# Altium PCB PDB_final_han.PcbDoc
Units mm, origin at the board's own origin, x right, y up, seen from the top; angles counter-clockwise.
Board outline 60 x 50 mm, 2 copper layers (Top Layer, Bottom Layer); 36 components, 24 nets, 114 pads, 23 vias.
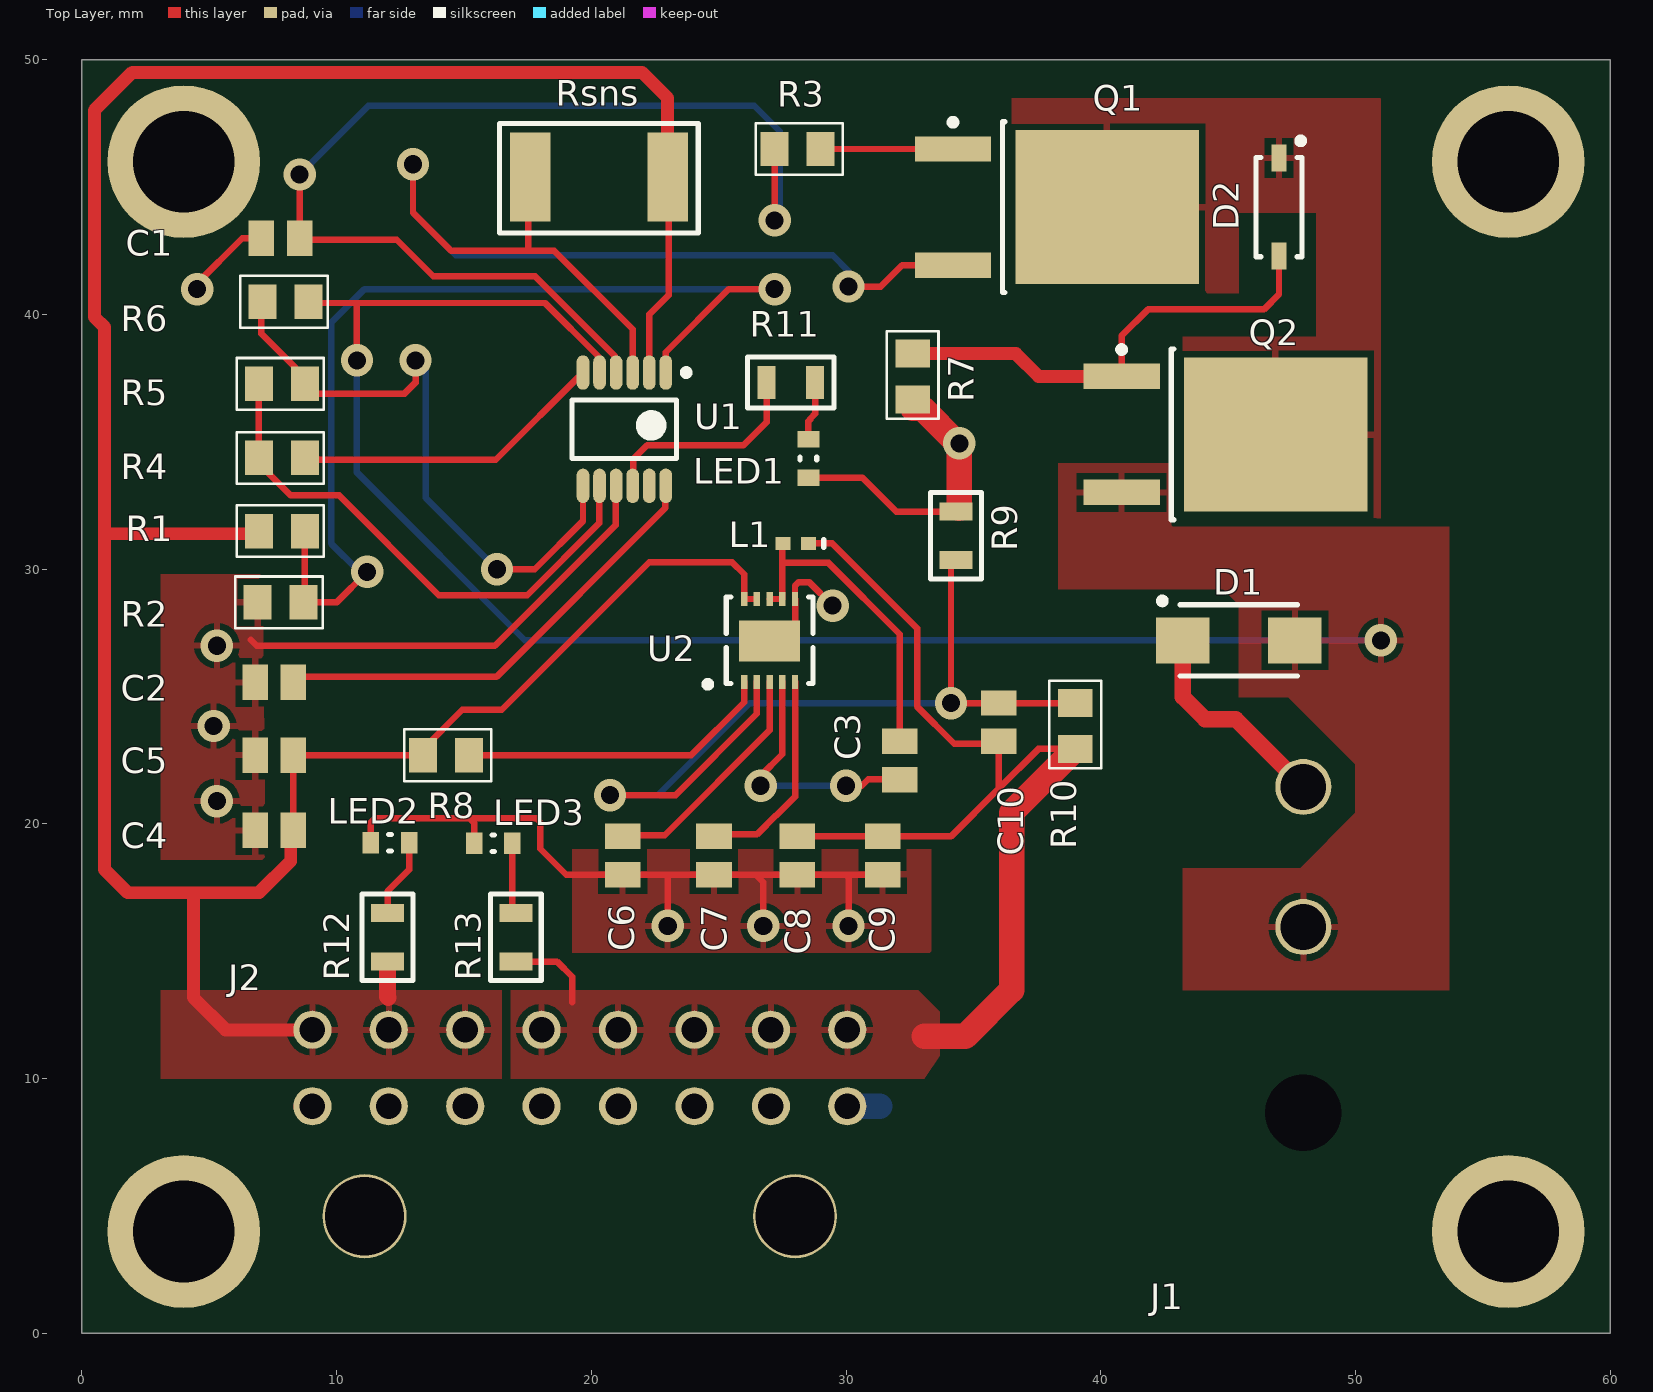
[diagram p0: Top Layer view]
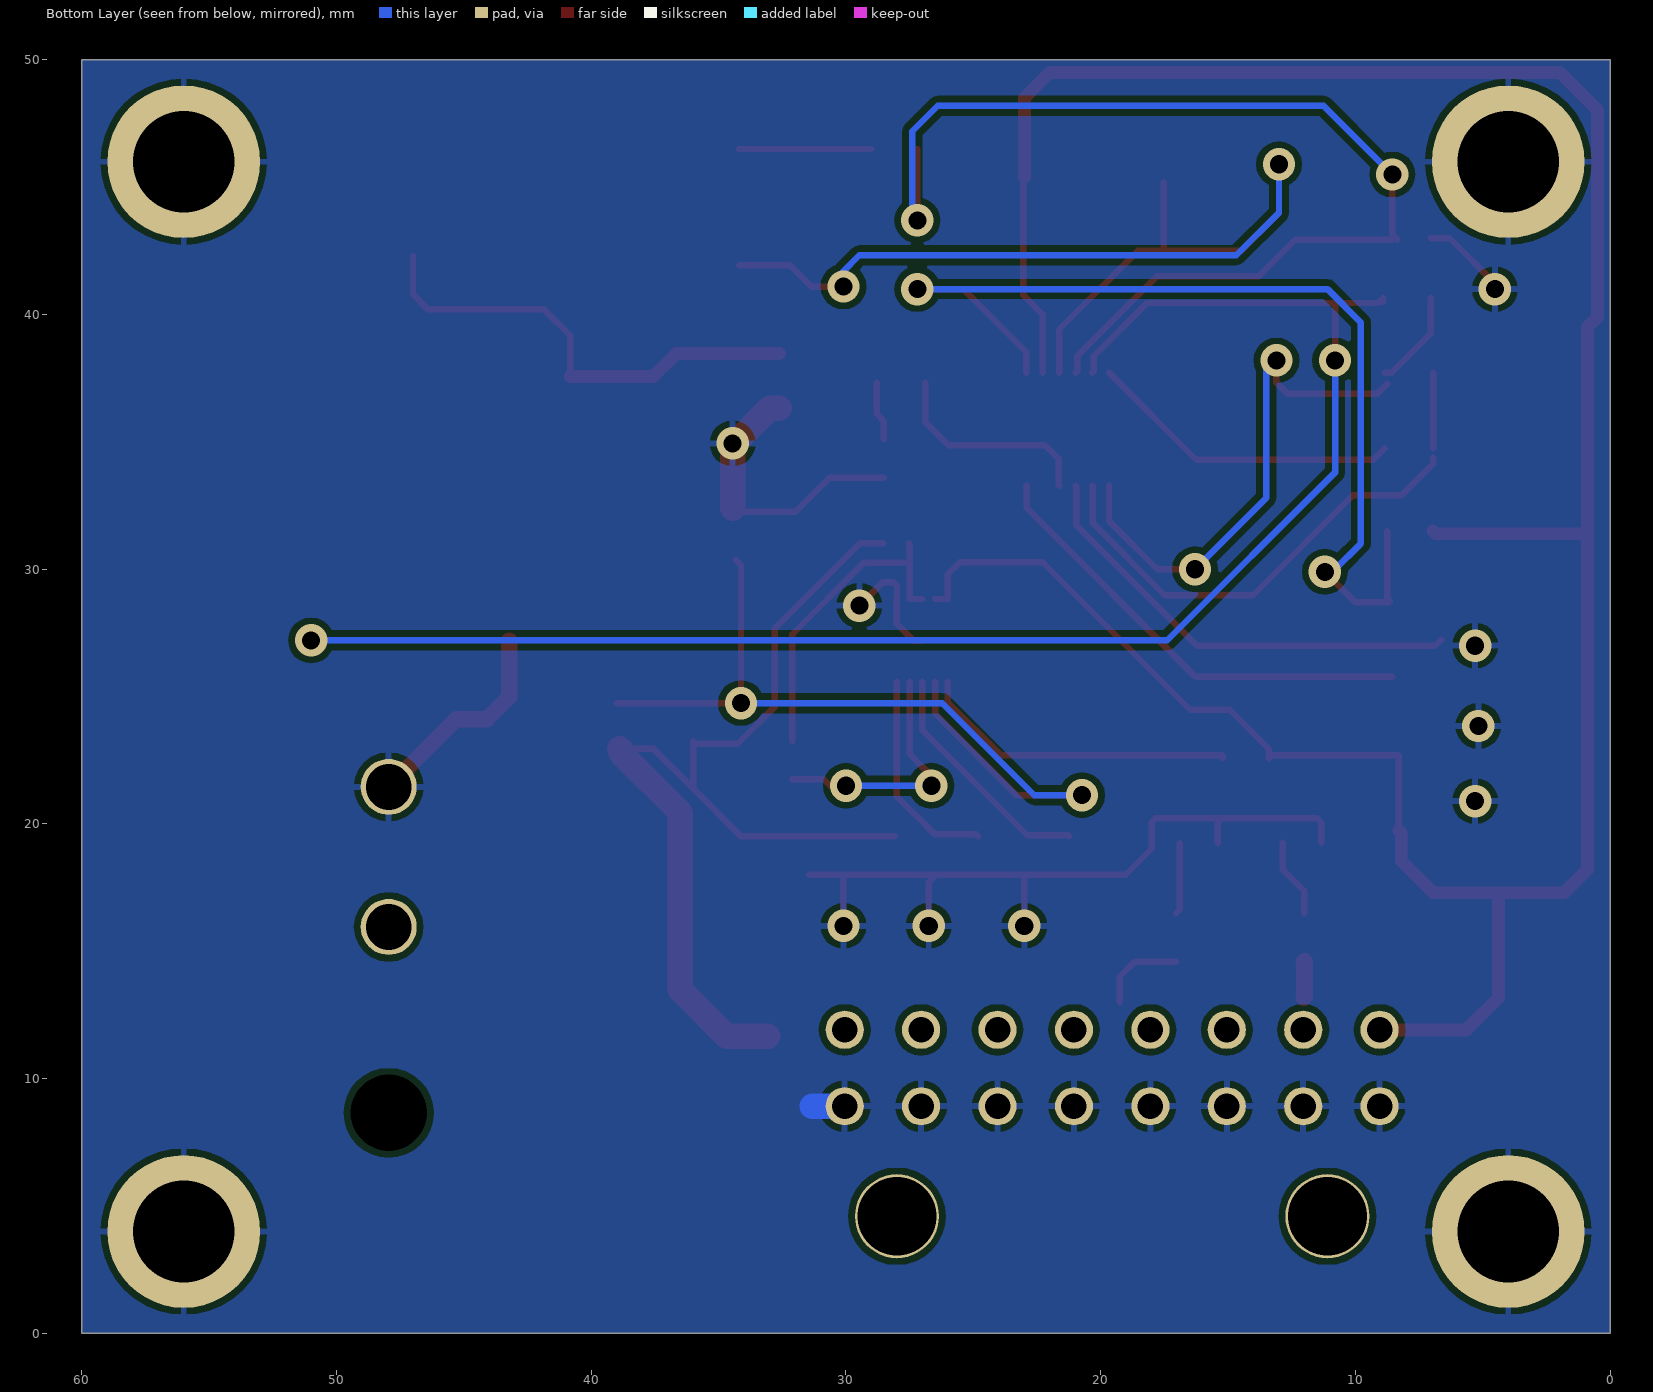
[diagram p1: Bottom Layer view, seen from below]
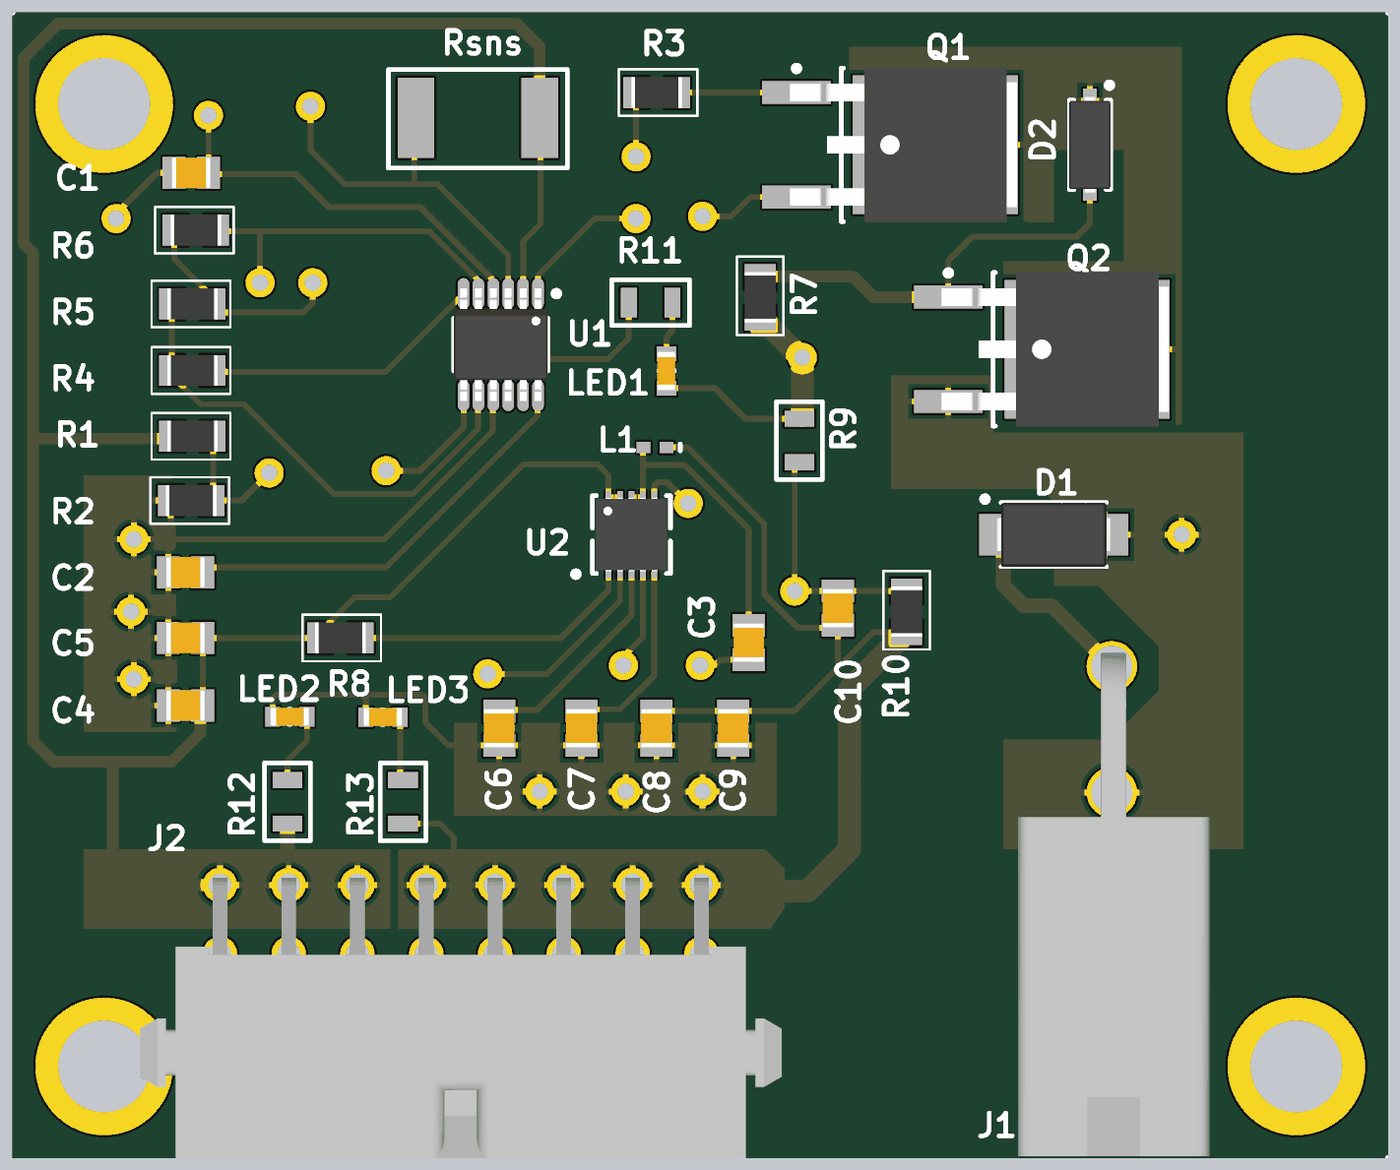
[diagram p2: 3D render of the assembled board from above, using the file's embedded part models]

## Layer stack, top to bottom
Top Solder: solder mask 0.0102, Solder Resist, Dk 3.5
Top Layer: signal copper 0.0356
Dielectric 1: dielectric 0.32, FR-4, Dk 4.8
Bottom Layer: signal copper 0.0356
Bottom Solder: solder mask 0.0102, Solder Resist, Dk 3.5

## Board outline
0,0 60,0 60,50 0,50

## Design rules (kind name [scope] priority, off if disabled: settings)
Clearance [All] p1: gap=0.254 ignorepadtopadclearanceinfootprint=TRUE except(0: Arc-Hole Track-Hole SMDPad-Hole THPad-Hole Via-Hole Fill-Hole Poly-Hole Region-Hole Text-Hole; 0.2: Arc-Arc Arc-Track Arc-SMDPad Track-Track Track-SMDPad SMDPad-SMDPad)
PolygonConnect [All] p1: connectstyle=Relief reliefconductorwidth=0.254 reliefentries=4 polygonreliefangle="90 Angle" airgapwidth=0.254
RoutingVias [All] p1: holewidth=0.711 width=1.27 viastyle="Through Hole" minholewidth=0.711 minwidth=1.27 maxholewidth=0.711 maxwidth=1.27
SolderMaskExpansion [All] p1: expansion=0.102
Width [All] p1: maxlimit=1.25 minlimit=0.254 preferedwidth=0.254 minimp=50.000000 maximp=50.000000 favimp=50.000000
30 further rules are at their usual default settings.

## Components (designator, comment, footprint, x,y, rotation, side; value= is the part's Value field where it differs from the comment)
C1 "47nF" CAPC1613X09N 7.8,43 r0 top
C2 "0.1uF C" CAPC1613X09N 7.548,25.563 r0 top
C3 "100nF 25V" CAPC1613X09N 32.115,22.496 r90 top
C4 "47nF" CAPC1613X09N 7.548,19.75 r0 top
C5 "47nF" CAPC1613X09N 7.55,22.7 r0 top
C6 "47nF" CAPC1613X09N 21.234,18.762 r90 top
C7 "47nF" CAPC1613X09N 24.817,18.762 r90 top
C8 "22uF 10V" CAPC1613X09N 28.09,18.762 r90 top
C9 "22uF 10V" CAPC1613X09N 31.44,18.762 r90 top
C10 "10pF" CAPC1613X09N 36,24 r270 top
D1 "TVS DIODE" DIODE_TVS 45.42,27.209 r0 top
D2 "Zerner Diode" DIOM3716X14N 47,44.22 r270 top
J1 "0768250002" MOLEX_2PIN_MEGAFIT 47.953,8.658 r0 top
J2 "4-794619-6" "THERMO HDR" 5.55,0 r0 top
L1 "Inductor" 0402-A 28.028,31.016 r180 top value=3.3uH
LED1 "Red" LED2 28.525,34.35 r270 top
LED2 "GREEN" LED2 12.097,19.262 r180 top
LED3 "GREEN" LED2 16.155,19.25 r180 top
Q1 "IRLR2908TRLPBF" DPAK 38.3,44.22 r0 top
Q2 "STD35P6LLF6" DPAK 44.92,35.296 r0 top
R1 "56K" R0805#1 7.851,31.5 r0 top
R2 "5K" R0805#1 7.8,28.7 r0 top
R3 "10 ohm" R0805#1 28.1,46.5 r180 top
R4 "100K R" R0805#1 7.851,34.372 r0 top
R5 "10K" R0805#1 7.851,37.279 r0 top
R6 "10K" R0805#1 8,40.5 r0 top
R7 "10K" R0805#1 32.615,37.566 r270 top
R8 "Res1" R0805#1 14.3,22.7 r180 top
R9 "Res1" R0805#2 34.325,31.316 r270 top
R10 "Res1" R0805#1 39,23.846 r270 top
R11 "665" R0805#2 27.834,37.332 r180 top
R12 "2.2k" R0805#2 12,15.552 r90 top
R13 "665" R0805#2 17.037,15.55 r90 top
Rsns "0.01OHM" R2512 20.3,45.4 r180 top
U1 "LT4363" TSOP65P490X110-12N 21.3,35.5 r270 top
U2 "AP65550FN-7" DFN-10 27,27.209 r0 top

## Footprints (in the part's own frame and the unit in brackets; to place one, negate y for a bottom-side part, rotate by r counter-clockwise, add the part's x,y. Pads: shape width x height; smd on the part's side, far side on the other; paste and mask are expansions set on the pad)
0402-A [mm] "Chip Inductor, Body 1.0x0.5mm, IPC High Density"
  rect 0.6x0.5 smd: 1(-0.5,0) 2(0.5,0)
  silkscreen extent -1.1,-0.15 -1.1,0.15, body extent -0.55,-0.3 0.55,0.3, height 0.55
CAPC1613X09N [mm] "Chip Capacitor, 2-Leads, Body 1.60x1.30mm, IPC Medium Density"
  rect 1x1.4 smd: 1(-0.75,0) 2(0.75,0)
  body extent -0.85,-0.67 0.85,0.67, height 0.9
DFN-10 [mm] "QFN, 10-Leads, Body 3.00x3.00mm, Pitch 0.50mm, Thermal Pad 2.40x1.60mm, IPC Medium Density"
  rect 0.25x0.55 smd: 1(-1,-1.625) 2(-0.5,-1.625) 3(0,-1.625) 4(0.5,-1.625) 5(1,-1.625) 6(1,1.625) 7(0.5,1.625) 8(0,1.625) 9(-0.5,1.625) 10(-1,1.625)
  rect 2.4x1.6 smd: 11(0,-0.025)
  silkscreen extent -2.55,-1.85 1.7,1.7, body extent -1.55,-1.6 1.55,1.6, height 0.63
DIODE_TVS [mm] "Molded Diode, 2-Leads, Body 4.29x2.59mm, IPC Medium Density"
  rect 2.1x1.8 smd: 1(-2.2,0) 2(2.2,0)
  silkscreen extent -3.12,-1.4 2.3,1.67, body extent -2.52,-1.4 2.52,1.4, height 2.29
DIOM3716X14N [mm] "Molded Diode, 2-Leads, Body 3.70x1.60mm, IPC Medium Density"
  rect 1.05x0.6 smd: 1(-1.925,0) 2(1.925,0)
  silkscreen extent -2.72,-0.9 1.95,0.97, body extent -2.14,-0.9 2.14,0.9, height 1.35
DPAK [mm] "D-PAK, 3-Pads, Body 6.21x6.73mm (max), IPC Medium Density"
  rect 3x1 smd: 1(-4.1,2.28) 3(-4.1,-2.28)
  rect 7.2x6.05 smd: 4(1.95,0)
  silkscreen extent -4.22,-3.35 -2.05,3.45, body extent -4.39,-3.37 5.52,3.37, height 2.52
LED2 [mm] "Chip Capacitor, 2-Leads, Body 1.60x0.70mm, IPC Medium Density"
  rect 0.65x0.85 smd: 1(-0.75,0) 2(0.75,0)
  silkscreen extent -0.05,-0.33 0.05,0.33, body extent -0.85,-0.4 0.85,0.4, height 0.8
MOLEX_2PIN_MEGAFIT [mm]
  round 2.2 hole 1.8: 1(0,7.3) 2(0,12.8)
  round 0 hole 3: ""(0,0)
  body extent -4.1,-8.58 4.25,13.38, height 14.75
R0805#1 [mm] "Chip Resistor, 2-Leads, Body 2.09x1.30mm, IPC Medium Density"
  rect 1.1x1.35 smd: 1(-0.9,0) 2(0.9,0)
  silkscreen extent -1.78,-1.02 1.65,1.02, body extent -1.1,-0.67 1.1,0.67, height 0.6
R0805#2 [mm]
  rect 0.7x1.3 smd: 1(-0.95,0) 2(0.95,0)
  silkscreen extent -1.7,-1 1.7,1
R2512 [mm]
  rect 1.6x3.5 smd: 1(-2.7,0) 2(2.7,0)
  silkscreen extent -3.9,-2.1 3.9,2.2
"THERMO HDR" [mm]
  round 1.5 hole 1: 1(3.5,11.92) 2(6.5,11.92) 3(9.5,11.92) 4(12.5,11.92) 5(15.5,11.92) 6(18.5,11.92) 7(21.5,11.92) 8(24.5,11.92) 9(24.5,8.92) 10(21.5,8.92) 11(18.5,8.92) 12(15.5,8.92) 13(12.5,8.92) 14(9.5,8.92) 15(6.5,8.92) 16(3.5,8.92)
  round 3.3 hole 3.1: 27(5.55,4.6) 27(22.45,4.6)
  body extent 0,0 28,12.24, height 8.73
TSOP65P490X110-12N [mm] "TSOP, 12-Leads, Body 4.04x3.00mm, Pitch 0.65mm, IPC Medium Density"
  oval 1.35x0.5 smd: 1(-2.225,1.625) 2(-2.225,0.975) 3(-2.225,0.325) 4(-2.225,-0.325) 5(-2.225,-0.975) 6(-2.225,-1.625) 7(2.225,-1.625) 8(2.225,-0.975) 9(2.225,-0.325) 10(2.225,0.325) 11(2.225,0.975) 12(2.225,1.625)
  silkscreen extent -2.35,-2.05 1.15,2.55, body extent -2.45,-2.05 2.45,2.05, height 1.1

## Part data
C1 C4 C5 C6 C7: library part GCM188R71H473KA55D, "CAP CER 0.047UF 50V X7R 0603", Case/Package=0603, Case Code (Metric)=1608, Dielectric=X7R, Manufacturer=Murata, Max Operating Temperature=125°C, Min Operating Temperature=-55°C, Package Quantity=1, Ratings=AEC-Q200, Supplier Part Number 1=490-4934-1-ND, Tolerance=10%, Voltage=50V, Capacitance=47nF, Case Code (Imperial)=0603, Depth=0.8mm, Height=0.8mm, Lead Free="Lead Free", Length=1.6mm, Manufacturer Part Number=GCM188R71H473KA55D, Mount="Surface Mount", Packaging="Tape and Reel", Pricing 1="1=0.16, 10=0.115, 100=0.054, 500=0.03788, 1000=0.03136 (USD)", Radiation Hardening=No, REACH SVHC="No SVHC", Stock 1=40000, Supplier 1=Digi-Key, Termination=SMD/SMT, Thickness=0.035inch, Voltage Rating=50V, Voltage Rating (DC)=50V, Width=0.031inch
C2: library part CL05A104KA5NNNC, "Cap Ceramic 0.1uF 25V X5R 10% SMD 0402 85C Paper T/R", Capacitance=100nF, Case/Package=0402, Case Code (Metric)=1005, Dielectric=X5R, Manufacturer=Samsung, Max Operating Temperature=85°C, Min Operating Temperature=-55°C, Package Quantity=1, Supplier Part Number 1=1276-1043-6-ND, Tolerance=10%, Voltage=25V, Case Code (Imperial)=0402, Depth=0.5mm, Height=0.5mm, Lead Free="Lead Free", Length=1mm, Manufacturer Part Number=CL05A104KA5NNNC, Mount="Surface Mount", Packaging="Tape and Reel", Pricing 1="1=0.1, 10=0.032, 100=0.0141, 500=0.01006, 1000=0.00791, 2500=0.00719, 5000=0.00661 (USD)", Radiation Hardening=No, Stock 1=100000, Supplier 1=Digi-Key, Thickness=0.022inch, Voltage Rating=25V, Voltage Rating (DC)=25V, Width=0.02inch
C3 C8 C9 C10: library part GCM188R71H473KA55D, "CAP CER 0.047UF 50V X7R 0603", Capacitance=47nF, Case/Package=0603, Case Code (Metric)=1608, Dielectric=X7R, Manufacturer=Murata, Max Operating Temperature=125°C, Min Operating Temperature=-55°C, Package Quantity=1, Ratings=AEC-Q200, Supplier Part Number 1=490-4934-1-ND, Tolerance=10%, Voltage=50V, Case Code (Imperial)=0603, Depth=0.8mm, Height=0.8mm, Lead Free="Lead Free", Length=1.6mm, Manufacturer Part Number=GCM188R71H473KA55D, Mount="Surface Mount", Packaging="Tape and Reel", Pricing 1="1=0.16, 10=0.115, 100=0.054, 500=0.03788, 1000=0.03136 (USD)", Radiation Hardening=No, REACH SVHC="No SVHC", Stock 1=40000, Supplier 1=Digi-Key, Termination=SMD/SMT, Thickness=0.035inch, Voltage Rating=50V, Voltage Rating (DC)=50V, Width=0.031inch
D1: library part SMAJ58A-13-F, "TVS DIODE 58VWM 93.6VC SMA", Breakdown Voltage=64.4V, Capacitance=180pF, Case/Package=SMA, Clamping Voltage=93.6V, Current=43A, Forward Voltage=3.5V, Leakage Current=5uA, Manufacturer=Diodes, Max Breakdown Voltage=71.2V, Max Operating Temperature=150°C, Max Output Current=4.3A, Max Power Dissipation=400W, Max Surge Current=40A, Min Operating Temperature=-55°C, Package Quantity=5000, Power Line Protection=No, Reverse Standoff Voltage=58V, Supplier Part Number 1=SMAJ58A-13-FDIDKR-ND, Test Current=1mA, Composition=Zener, Contact Plating=Matte,Tin, Direction=Unidirectional, Element Configuration=Single, ESD Protection=No, Height=2.3mm, Lead Free="Lead Free", Length=2.92mm, Manufacturer Part Number=SMAJ58A-13-F, Max Reverse Leakage Current=5uA, Min Breakdown Voltage=64.4V, Mount="Surface Mount", Number of Elements=1, Number of Pins=2, Number of Unidirectional Channels=1, Packaging="Tape and Reel", Peak Pulse Current=4.3A, Peak Pulse Power=400W, Polarity=Unidirectional, Power Dissipation=400W, Pricing 1="1=0.41, 10=0.311, 100=0.1937, 500=0.13256, 1000=0.10197 (USD)", Radiation Hardening=No, Reverse Breakdown Voltage=64.4V, Stock 1=387453, Supplier 1=Digi-Key, Termination=SMD/SMT, Voltage=58V, Width=4.6mm, Working Voltage=58V
D2: library part 1N4148W-TP, "DIODE GEN PURP 100V 150MA SOD123", Average Rectified Current=150mA, Capacitance=4pF, Forward Voltage=1V, Manufacturer=MCC, Max Forward Surge Current (Ifsm)=1A, Max Operating Temperature=150°C, Max Repetitive Reverse Voltage (Vrrm)=100V, Max Reverse Leakage Current=5uA, Max Surge Current=2A, Min Operating Temperature=-65°C, Package Quantity=3000, Power Dissipation=400mW, Supplier Part Number 1=1N4148WTPMSDKR-ND, Current Rating=150mA, Element Configuration=Single, Forward Current=150mA, Height=1.2mm, Lead Free="Lead Free", Length=2.85mm, Manufacturer Part Number=1N4148W-TP, Max Reverse Voltage (DC)=100V, Mount="Surface Mount", Number of Pins=2, Output Current=150mA, Packaging="Tape and Reel", Peak Non-Repetitive Surge Current=2A, Polarity=Standard, Pricing 1="1=0.14, 10=0.131, 100=0.0856, 500=0.04186, 1000=0.02854 (USD)", Radiation Hardening=No, REACH SVHC=Unknown, Recovery Time=4ns, Reverse Recovery Time=4ns, Stock 1=546277, Supplier 1=Digi-Key, Voltage Rating (DC)=100V, Width=1.8mm
J1: "CONN_2Position_MEGAFIT Molex Through Hole, Right Angle Tin", Colour=Black, Manufacturer=Molex, Supplier Part Number 1=WM11969-ND, ComponentLink1Description=http://www.molex.com/pdm_docs/ps/PS-76823-100.pdf, ComponentLink1URL=http://www.molex.com/pdm_docs/ps/PS-76823-100.pdf, Connector Type="Male Pin", Contact Plating=Tin, Fastening Type=Ramp, Manufacturer Part Number=0768250002, Mount="Through Hole", Number of Positions=2, Number of Rows=2, Packaging=Tray, Pricing 1="1=1.08, 10=0.946, 25=0.89, 50=0.853, 100=0.816, 250=0.7418, 500=0.6676, 1000=0.5934, 2500=0.5378 (USD)", Row Spacing=0.224inch, Stock 1=2862, Supplier 1=Digi-Key, Termination=Solder
J2: "CONN HEADER R/A 16POS 3MM", Color=Black, Contact Current Rating=5A, Flammability Rating="UL94 V-0", Manufacturer="TE Connectivity", Max Operating Temperature=221°C, Max Voltage Rating (AC)=250V, Min Operating Temperature=-40°C, Number of Power Positions=16, Package Quantity=130, Supplier Part Number 1=A121591-ND, Approvals=CSA, Circuit Application=Power, ComponentLink1Description=http://www.te.com/commerce/DocumentDelivery/DDEController?Action=srchrtrv&DocNm=82181_SOFTSHELL_HIGH_DENSITY&DocType=Catalog+Section&DocLang=English&PartCntxt=&src-supplier=Avnet, ComponentLink1URL=http://www.te.com/commerce/DocumentDelivery/DDEController?Action=srchrtrv&DocNm=82181_SOFTSHELL_HIGH_DENSITY&DocType=Catalog+Section&DocLang=English&PartCntxt=&src-supplier=Avnet, ComponentLink2Description=http://www.te.com/commerce/DocumentDelivery/DDEController?Action=srchrtrv&DocNm=794619&DocType=Customer+Drawing&DocLang=English&src-supplier=Digi-Key, ComponentLink2URL=http://www.te.com/commerce/DocumentDelivery/DDEController?Action=srchrtrv&DocNm=794619&DocType=Customer+Drawing&DocLang=English&src-supplier=Digi-Key, ComponentLink3Description=http://www.onlinecomponents.com/productFiles/mf-AMP/eng_cs_82181_softshell_high_density_0508.pdf?src-supplier=Onlinecomponents.com, ComponentLink3URL=http://www.onlinecomponents.com/productFiles/mf-AMP/eng_cs_82181_softshell_high_density_0508.pdf?src-supplier=Onlinecomponents.com, Connector System=Wire-to-Board, Connector Type=Pin, Contact Material=Brass, Contact Plating=Gold,Tin, Contact Retention="No (Without)", Current Rating=5A, Depth=11.92mm, ELV=Compliant, Fastening Type=Ramp, Housing Color=Black, Housing Material=Nylon, Length=28mm, Manufacturer Part Number=4-794619-6, Mating Alignment="Yes (With)", Mating Retention="Yes (With)", Mount="Through Hole", Number of Contacts=16, Number of Ports=1, Number of Positions=16, Number of Rows=2, Number of Terminals=16, Orientation="Right Angle", Packaging=Tray, PCB Mounting Orientation="Right Angle", PCB Mount Retention=With, PCB Thickness=0.063inch, Pitch=0.118inch, Pricing 1="1=2.43, 10=2.209, 130=1.8933, 520=1.5778, 1040=1.3524, 5070=1.1991 (USD)", Radiation Hardening=No, Row Spacing=0.118mm, Sealable="No (Without)", Stock 1=1304, Strain Relief="No (Without)", Supplier 1=Digi-Key, Termination=Solder, VDE Tested=Yes, Voltage Rating=250V
L1: "IND 3.3µH 6.5A 25.2 mOhm Max Nonstandard", Code_IEC=1005, Code_JEITA=0402, LatestRevisionDate=29-May-2009, LatestRevisionNote="IPC-7351 Footprint Added.", PackageDescription="Chip Inductor", PackageReference=0402-A, Published=8-Jun-2000, Publisher="Altium Limited"
LED1 LED2 LED3: library part 150060VS75000, "LED GREEN CLEAR 0603 SMD", Case/Package=0603, Case Code (Metric)=1608, Colour=Green, Forward Current=30mA, Forward Voltage=2V, Manufacturer="Wurth Electronics", Max Operating Temperature=85°C, Min Operating Temperature=-40°C, Package Quantity=1, Supplier Part Number 1=732-4980-1-ND, Test Current=20mA, Case Code (Imperial)=0603, ComponentLink1Description=http://www.farnell.com/datasheets/1911347.pdf, ComponentLink1URL=http://www.farnell.com/datasheets/1911347.pdf, ComponentLink2Description=https://katalog.we-online.de/led/datasheet/150060VS75000.pdf, ComponentLink2URL=https://katalog.we-online.de/led/datasheet/150060VS75000.pdf, ComponentLink3Description=https://www.distrelec.biz/Web/Downloads/_t/ds/150060VS75000_eng_tds.pdf?mime=application%2Fpdf, ComponentLink3URL=https://www.distrelec.biz/Web/Downloads/_t/ds/150060VS75000_eng_tds.pdf?mime=application%2Fpdf, ComponentLink4Description=http://www.produktinfo.conrad.com/datenblaetter/750000-774999/759431-da-01-en-CHIPLED_0603_W_KL_H_GRUEN_150060VS7500.pdf, ComponentLink4URL=http://www.produktinfo.conrad.com/datenblaetter/750000-774999/759431-da-01-en-CHIPLED_0603_W_KL_H_GRUEN_150060VS7500.pdf, Dominant Wavelength=570nm, Height=0.7mm, Length=1.6mm, Lens Style=Clear,Rectangular, Luminous Intensity=40mcd, Manufacturer Part Number=150060VS75000, Mount="Surface Mount", Number of Pins=2, Packaging="Tape and Reel", Pricing 1="1=0.14, 50=0.129, 100=0.11, 500=0.095 (USD)", REACH SVHC=Unknown, Stock 1=219425, Supplier 1=Digi-Key, Viewing Angle=140°, Wavelength=570nm, Width=0.8mm
Q1: "MOSFET N-CH 80V 30A DPAK", Case/Package=DPAK, Continuous Drain Current (ID)=39A, Drain to Source Breakdown Voltage=80V, Drain to Source Resistance=28mR, Gate to Source Voltage (Vgs)=16V, Input Capacitance=1.89nF, Manufacturer="International Rectifier", Max Operating Temperature=175°C, Max Power Dissipation=120W, Min Operating Temperature=-55°C, On-State Resistance=28MR, Package Quantity=1, Supplier Part Number 1=IRLR2908TRLPBFDKR-ND, Threshold Voltage=1V, Drain to Source Voltage (Vdss)=80V, Element Configuration=Single, Fall Time=55ns, Height=2.26mm, Length=6.73mm, Manufacturer Part Number=IRLR2908TRLPBF, Mount="Surface Mount", Nominal Vgs=1V, Number of Elements=1, Number of Pins=3, Packaging="Tape and Reel", Power Dissipation=120W, Pricing 1="1=1.4, 10=1.239, 100=0.9794, 500=0.75958, 1000=0.59966 (USD)", Radiation Hardening=No, Rds On Max=28mR, REACH SVHC="No SVHC", Rise Time=95ns, Stock 1=4490, Supplier 1=Digi-Key, Turn-Off Delay Time=36ns, Turn-On Delay Time=12ns, Width=6.22mm
Q2: "POWER MOSFET", Case/Package=TO-252-3, Continuous Drain Current (ID)=35A, Drain to Source Voltage (Vdss)=60V, Input Capacitance=3.78nF, Manufacturer=STMicroelectronics, Max Power Dissipation=70W, Supplier Part Number 1=497-15462-6-ND, Manufacturer Part Number=STD35P6LLF6, Mount="Surface Mount", Packaging="Tape and Reel", Pricing 1="1=1.41, 10=1.248, 100=0.9867, 500=0.76518, 1000=0.6041 (USD)", Rds On Max=28mR, Stock 1=7152, Supplier 1=Digi-Key
R1: library part ERA-6AEB104V, "Res Thin Film 0805 100K Ohm 0.1% 0.125W(1/8W) ±25ppm/C Molded SMD Automotive Punched T/R", Case/Package=0805, Case Code (Metric)=2012, Manufacturer=Panasonic, Max Operating Temperature=155°C, Max Power Dissipation=125mW, Min Operating Temperature=-55°C, Package Quantity=1, Resistance=100kR, Temperature Coefficient=25ppm/°C, Tolerance=0.1%, Voltage Rating=100V, Case Code (Imperial)=0805, Composition="Thin Film", Contact Plating=Tin, Depth=1.25mm, Features="Automotive AEC-Q200", Height=0.5mm, Lead Free="Lead Free", Length=2mm, Manufacturer Part Number=ERA-6AEB104V, Military Standard=Not, Mount="Surface Mount", Number of Pins=2, Number of Terminations=2, Packaging="Tape and Reel", Power Rating=125mW, Pricing 1="1=0.324, 10=0.2241, 25=0.2017, 100=0.1064, 250=0.0956, 500=0.0945, 1000=0.0477, 3000=0.0408 (USD)", Radiation Hardening=No, REACH SVHC="No SVHC", Stock 1=2428, Supplier 1=Arrow, Supplier Part Number 1=ERA-6AEB104V, Termination=Solder, Voltage Rating (DC)=100V, Width=1.25mm
R2 R6: library part PNM0805E5001BST5, "Thin Film Resistors - SMD 200mW 5Kohm 0.1% 25ppm", Case/Package=0805, Case Code (Metric)=2012, Manufacturer="Vishay Dale Thin Film", Max Operating Temperature=125°C, Min Operating Temperature=-55°C, Power Rating=200mW, Resistance=5kR, Supplier Part Number 1=1857222, Temperature Coefficient=25ppm/°C, Tolerance=0.1%, Voltage Rating=100V, Case Code (Imperial)=0805, Composition="Thin Film", Height=0.015inch, Length=0.08inch, Manufacturer Part Number=PNM0805E5001BST5, Packaging="Tape and Reel", Pricing 1="1=2.59, 10=1.9, 50=1.53, 100=1.36 (GBP)", Radiation Hardening=No, REACH SVHC=Unknown, Stock 1=1231, Supplier 1=Farnell, Voltage Rating (DC)=100V, Width=0.05inch
R3: library part RL1220S-100-F, "RES SMD 10 OHM 1% 1/3W 0805", Case/Package=0805, Case Code (Metric)=2012, Manufacturer=Susumu, Max Operating Temperature=125°C, Max Power Dissipation=333mW, Min Operating Temperature=-55°C, Package Quantity=1, Power Rating=250mW, Resistance=10R, Supplier Part Number 1=754-RL1220S-100-F, Temperature Coefficient=200ppm/°C, Tolerance=1%, Voltage Rating (DC)=100V, Case Code (Imperial)=0805, Composition="Thin Film", Height=0.02inch, Lead Free="Lead Free", Length=0.079inch, Manufacturer Part Number=RL1220S-100-F, Number of Pins=2, Number of Terminations=2, Packaging="Tape and Reel", Pricing 1="1=0.34, 10=0.156, 50=0.156, 100=0.07, 1000=0.048, 10000=0.034 (USD)", REACH SVHC=Unknown, Stock 1=32764, Supplier 1=Mouser, Termination=SMD/SMT, Weight=0.000194oz, Width=0.049inch
R4: library part KTR10EZPF2203, "RES 220K OHM 1/8W 1% 0805 SMD", Case/Package=0805, Manufacturer=Rohm, Resistance=220000R, Supplier Part Number 1=RHM220KAHDKR-ND, Manufacturer Part Number=KTR10EZPF2203, Pricing 1="1=0.19, 10=0.16, 100=0.0624, 1000=0.02614, 2500=0.02396 (USD)", Stock 1=23335, Supplier 1=Digi-Key
R5 R7: library part RNCF0805DTE10K0, "Res Thin Film 0805 10K Ohm 0.5% 0.1W(1/10W) ±25ppm/C Molded SMD Paper T/R", Case/Package=0805, Case Code (Metric)=2012, Manufacturer="Stackpole Electronics", Max Operating Temperature=155°C, Max Power Dissipation=125mW, Min Operating Temperature=-55°C, Resistance=10kR, Supplier Part Number 1=RNCF0805DTE10K0DKR-ND, Temperature Coefficient=25ppm/°C, Tolerance=0.5%, Case Code (Imperial)=0805, Composition="Thin Film", Contact Plating=Matte,Tin, Depth=1.25mm, Features="Moisture Resistant", Height=0.026inch, Length=2mm, Manufacturer Part Number=RNCF0805DTE10K0, Military Standard=Not, Mount="Surface Mount", Number of Terminations=2, Packaging="Tape and Reel", Pricing 1="1=0.17, 10=0.14, 100=0.0546, 1000=0.02287, 2500=0.02096 (USD)", Radiation Hardening=No, Stock 1=377154, Supplier 1=Digi-Key, Width=0.049inch
R8: library part ERA-6AEB104V, "Res Thin Film 0805 1K Ohm 0.1% 0.125W(1/8W) ±25ppm/C Molded SMD Automotive Punched T/R", Case/Package=0805, Case Code (Metric)=2012, Manufacturer=Panasonic, Max Operating Temperature=155°C, Max Power Dissipation=125mW, Min Operating Temperature=-55°C, Package Quantity=1, Resistance=100kR, Temperature Coefficient=25ppm/°C, Tolerance=0.1%, Voltage Rating=100V, Case Code (Imperial)=0805, Composition="Thin Film", Contact Plating=Tin, Depth=1.25mm, Features="Automotive AEC-Q200", Height=0.5mm, Lead Free="Lead Free", Length=2mm, Manufacturer Part Number=ERA-6AEB104V, Military Standard=Not, Mount="Surface Mount", Number of Pins=2, Number of Terminations=2, Packaging="Tape and Reel", Power Rating=125mW, Pricing 1="1=0.324, 10=0.2241, 25=0.2017, 100=0.1064, 250=0.0956, 500=0.0945, 1000=0.0477, 3000=0.0408 (USD)", Radiation Hardening=No, REACH SVHC="No SVHC", Stock 1=2428, Supplier 1=Arrow, Supplier Part Number 1=ERA-6AEB104V, Termination=Solder, Voltage Rating (DC)=100V, Width=1.25mm
R9 R11 R12 R13: library part ERA-6AEB104V, "Res Thin Film 0805 22.1K Ohm 0.1% 0.125W(1/8W) ±25ppm/C Molded SMD Automotive Punched T/R", Case/Package=0805, Case Code (Metric)=2012, Manufacturer=Panasonic, Max Operating Temperature=155°C, Max Power Dissipation=125mW, Min Operating Temperature=-55°C, Package Quantity=1, Resistance=100kR, Temperature Coefficient=25ppm/°C, Tolerance=0.1%, Voltage Rating=100V, Case Code (Imperial)=0805, Composition="Thin Film", Contact Plating=Tin, Depth=1.25mm, Features="Automotive AEC-Q200", Height=0.5mm, Lead Free="Lead Free", Length=2mm, Manufacturer Part Number=ERA-6AEB104V, Military Standard=Not, Mount="Surface Mount", Number of Pins=2, Number of Terminations=2, Packaging="Tape and Reel", Power Rating=125mW, Pricing 1="1=0.324, 10=0.2241, 25=0.2017, 100=0.1064, 250=0.0956, 500=0.0945, 1000=0.0477, 3000=0.0408 (USD)", Radiation Hardening=No, REACH SVHC="No SVHC", Stock 1=2428, Supplier 1=Arrow, Supplier Part Number 1=ERA-6AEB104V, Termination=Solder, Voltage Rating (DC)=100V, Width=1.25mm
R10: library part ERA-6AEB104V, "Res Thin Film 0805 124K Ohm 0.1% 0.125W(1/8W) ±25ppm/C Molded SMD Automotive Punched T/R", Case/Package=0805, Case Code (Metric)=2012, Manufacturer=Panasonic, Max Operating Temperature=155°C, Max Power Dissipation=125mW, Min Operating Temperature=-55°C, Package Quantity=1, Resistance=100kR, Temperature Coefficient=25ppm/°C, Tolerance=0.1%, Voltage Rating=100V, Case Code (Imperial)=0805, Composition="Thin Film", Contact Plating=Tin, Depth=1.25mm, Features="Automotive AEC-Q200", Height=0.5mm, Lead Free="Lead Free", Length=2mm, Manufacturer Part Number=ERA-6AEB104V, Military Standard=Not, Mount="Surface Mount", Number of Pins=2, Number of Terminations=2, Packaging="Tape and Reel", Power Rating=125mW, Pricing 1="1=0.324, 10=0.2241, 25=0.2017, 100=0.1064, 250=0.0956, 500=0.0945, 1000=0.0477, 3000=0.0408 (USD)", Radiation Hardening=No, REACH SVHC="No SVHC", Stock 1=2428, Supplier 1=Arrow, Supplier Part Number 1=ERA-6AEB104V, Termination=Solder, Voltage Rating (DC)=100V, Width=1.25mm
Rsns: library part PE2512FKE7W0R01L, "RES SMD 0.01 OHM 1% 2W 2512", Case/Package=2512, Case Code (Metric)=6432, Manufacturer=Yageo, Max Operating Temperature=170°C, Max Power Dissipation=2W, Min Operating Temperature=-55°C, Resistance=10mR, Temperature Coefficient=50ppm/°C, Tolerance=1%, Case Code (Imperial)=2512, Composition="Metal Film", Features="Automotive AEC-Q200,Moisture Resistant", Height=0.03inch, Lead Free="Lead Free", Length=0.248inch, Manufacturer Part Number=PE2512FKE7W0R01L, Number of Terminations=2, Packaging="Tape and Reel", Pricing 1="1=0.57, 10=0.479, 25=0.4104, 50=0.3694, 100=0.3215, 250=0.28732, 500=0.23258, 1000=0.18812 (USD)", Stock 1=15960, Supplier 1=Digi-Key, Width=0.122inch
U1: library part LT4363CMS-2#PBF, "IC SURGE STOPPER HV 12-MSOP", Case/Package=MSOP, Clamping Voltage=27V, Manufacturer="Analog Devices / Linear Technology", Max Operating Temperature=70°C, Max Supply Voltage=80V, Min Operating Temperature=0°C, Min Supply Voltage=4V, Package Quantity=37, Supplier Part Number 1=LT4363CMS-2#PBF-ND, Lead Free="Lead Free", Manufacturer Part Number=LT4363CMS-2#PBF, Number of Circuits=1, Number of Pins=12, Packaging=Rail/Tube, Pricing 1="1=5.41, 25=3.6108, 100=3.0702 (USD)", REACH SVHC="No SVHC", Stock 1=1640, Supplier 1=Digi-Key, Working Voltage=80V
U2: "IC BUCK SYNC 5A, 18V VIN MAX 650kHz COT Step-Down Conv", Manufacturer=Diodes, Max Input Voltage=18V, Max Operating Temperature=85°C, Max Output Voltage=6V, Min Input Voltage=4.5V, Min Operating Temperature=-40°C, Min Output Voltage=760mV, Operating Supply Current=900uA, Output Current=5A, Package Quantity=3000, Supplier Part Number 1=AP65550FN-7DICT-ND, Switching Frequency=650kHz, Lead Free="Lead Free", Manufacturer Part Number=AP65550FN-7, Min Supply Voltage=4.5V, Mount="Surface Mount", Number of Outputs=1, Output Configuration=Positive, Output Type=Adjustable, Output Voltage=6V, Packaging="Tape and Reel", Pricing 1="1=0.77, 10=0.68, 100=0.5212, 500=0.412, 1000=0.3296 (USD)", Stock 1=135, Supplier 1=Digi-Key, Synchronous Rectifier=Yes

## Free pads (board coordinates)
  round 6 hole 4: 2(4,4) 2(4,46) 2(56,4) 2(56,46)

## Via types
v1: diameter 1.27, hole 0.711, Top Layer to Bottom Layer, 23 vias

## Nets (pads, with @x,y where several pads share a name; then routed paths per layer and width w, separated by ;. In a path a pad name is that pad's centre, name@x,y a point inside that pad or via, vN(x,y) a via of type N, cw(c..) or ccw(c..) an arc to the next point about the centre after c; other vN are vias at no path point)
5V_OUT: C8.2 C9.2 C10.2 J2.4 J2.5 J2.6 J2.7 J2.8 L1.1 R10.2 R13.1 | length 45.2
  Top Layer w0.254: R13.1 18.65,14.6 19.25,14 19.25,13 ; C8.2 C9.2 34.123,19.512 36,21.39 ; L1.1 29.461,31.016 32.79,27.687 32.79,24.613 34.253,23.15 35.9,23.15 C10.2 36,21.39 ; R10.2 38.875,22.946 37.556,22.946 36,21.39
  Top Layer w0.654: J2.4 J2.4@18.05,12.149
  Top Layer w1: J2.5@20.955,11.92 J2.5@21.051,12.016 ; 33.065,11.658 34.682,11.658 36.5,13.476 36.5,20.446 38.825,22.771 38.825,22.896 R10.2@38.875,22.946
12V_OUT: C4.2 C5.2 J2.1 J2.2 J2.3 R1.1 R8.2 R12.1 Rsns.1 U1.2 U2.9 U2.10 | length 116.7
  Top Layer w0.254: C4.2 C5.2 13.275,22.698 13.4,22.573 R8.2 13.4,22.946 14.934,24.48 16.48,24.48 22.275,30.275 25.525,30.275 26,29.8 U2.10 U2.9 ; U1.2 22.275,40.006 23.037,40.768 23.037,45.363 Rsns.1
  Top Layer w0.508: R1.1 6.847,31.396 0.896,31.396 ; C4.2 8.2,19.652 8.2,18.55 6.95,17.3 4.377,17.3 ; J2.1 5.646,11.92 4.377,13.19 4.377,17.3 ; Rsns.1 23,48.499 21.991,49.508 1.984,49.508 0.492,48.016 0.492,39.908 0.896,39.504 0.896,31.396 ; 0.896,31.396 0.896,18.207 1.803,17.3 4.377,17.3
  Top Layer w0.654: J2.2@12.025,11.945 J2.2 ; 12.025,13.19 12,13.215 R12.1 12.002,14.602 R12.1@12.025,14.579
+12V: D1.2 J1.1 Q2.3 R6.2 U1.5 | length 62.7
  Top Layer w0.254: R6.2 R6.2@9.06,40.5 ; R6.2@8.9,40.66 R6.2@9.06,40.5 ; v1(10.8,38.2) 10.8,40.454 ; U1.5 20.278,37.772 20.278,38.363 18.187,40.454 10.8,40.454 ; R6.2@9.06,40.5 9.106,40.454 10.8,40.454
  Bottom Layer w0.254: v1(10.8,38.2) 10.8,33.8 17.391,27.209 v1(51,27.209)
BOOTSTRAP_5V: C3.1 U2.4 | length 10
  Top Layer w0.254: v1(26.647,21.5) 26.647,21.888 27.5,22.741 U2.4 ; v1(30,21.5) 30.616,21.5 30.869,21.753 C3.1@32.115,21.753
  Bottom Layer w0.254: v1(26.647,21.5) v1(30,21.5)
DRAIN: D2.1 Q1.4 Q2.4
FB_5V: C10.1 R9.2 R10.1 U2.2 | length 33.8
  Top Layer w0.254: v1(20.734,21.132) 23.307,21.132 26.5,24.325 U2.2 ; R9.2 34.123,30.164 v1(34.123,24.746) 35.996,24.746 C10.1 36.004,24.746 R10.1
  Bottom Layer w0.254: v1(20.734,21.132) 22.605,21.132 26.219,24.746 v1(34.123,24.746)
FET_GATE: Q1.1 R3.1 | length 5.2
  Top Layer w0.254: R3.1 Q1.1
GND: C1.1 C2.1 C4.1 C5.1 C6.1 C7.1 C8.1 C9.1 D1.1 J1.2 J2.9 J2.10 J2.11 J2.12 J2.13 J2.14 J2.15 J2.16 LED1.2 LED2.2 LED3.2 pad.2 R2.1 R7.2 R9.1 U1.9 U2.6 U2.11 | length 77.3
  Top Layer w0.254: v1(4.523,41) 4.523,41.223 6.3,43 C1.1 ; 6.632,27.232 6.864,27 16.218,27 20.956,31.738 20.956,33.256 U1.9 ; LED2.2 11.347,20.068 11.501,20.223 15.216,20.223 ; LED3.2 15.405,20.034 15.216,20.223 ; v1(23,16) 23,17.975 23.037,18.012 ; v1(26.752,16) 26.752,17.715 26.454,18.012 ; U2.11 27.327,27.184 28,27.857 U2.6 27.998,28.836 27.998,29.351 28.147,29.5 28.548,29.5 v1(29.475,28.573) ; LED1.2 30.64,33.6 31.974,32.266 R9.1 R9.1@34.452,32.393 ; v1(30.1,16) 30.1,17.912 30,18.012 ; C9.1 30,18.012 ; 15.216,20.223 17.851,20.223 18,20.074 18,19.029 19.016,18.012 C6.1 23.037,18.012 ; 23.037,18.012 C7.1 26.454,18.012 ; 26.454,18.012 C8.1 30,18.012
  Top Layer w0.635: D1.1 43.22,24.992 44.1,24.112 45.299,24.112 47.911,21.5 J1.2@47.953,21.5
  Top Layer w1: J2.16@8.8,8.9 J2.16@9.05,8.9 ; R7.2@32.615,36.328 32.994,36.328 34.379,34.943 v1(34.452,34.943) R9.1@34.452,32.393
  Bottom Layer w1: J2.9 31.32,8.92
  other v1: 5.3,20.9 5.173,23.846 5.3,27
IC_GATE: C1.2 R3.2 U1.4 | length 44.3
  Top Layer w0.254: C1.2@8.348,42.94 8.55,43.142 v1(8.55,45.5) ; C1.2@8.55,42.94 12.36,42.94 13.8,41.5 17.791,41.5 20.928,38.363 20.928,37.772 U1.4 ; v1(27.2,43.7) R3.2
  Bottom Layer w0.254: v1(8.55,45.5) 11.25,48.2 26.4,48.2 27.4,47.2 27.4,43.9 v1(27.2,43.7)
NetC2_2: C2.2 U1.12 | length 18
  Top Layer w0.254: C2.2@8.55,25.775 16.275,25.775 22.906,32.406 22.906,33.275 U1.12
NetD2_2: D2.2 Q2.1 R7.1 | length 18.5
  Top Layer w0.254: Q2.1 40.82,39.164 41.859,40.203 46.408,40.203 47,40.795 D2.2
  Top Layer w0.508: R7.1 36.666,38.466 37.556,37.576 Q2.1
NetLED1_1: LED1.1 R11.1 | length 2.3
  Top Layer w0.254: LED1.1 28.525,35.806 28.595,35.876 28.595,35.915 28.784,36.104 R11.1
NetLED2_1: LED2.1 R12.2 | length 3.1
  Top Layer w0.254: R12.2 12,17.361 12.847,18.207 LED2.1
NetLED3_1: LED3.1 R13.2 | length 2.8
  Top Layer w0.254: LED3.1 16.905,16.632 R13.2
NetR1_2: R1.2 R2.2 U1.1 | length 41.6
  Top Layer w0.254: R1.2 8.751,28.855 8.648,28.752 R2.2 10,28.7 v1(11.2,29.9) ; U1.1 22.925,38.525 25.4,41 v1(27.2,41)
  Bottom Layer w0.254: v1(11.2,29.9) 11.2,30.3 11,30.1 10.85,29.95 9.784,31.016 9.784,39.684 11.1,41 26.8,41 27.2,41.4 v1(27.2,41)
NetR4_1: R4.1 R5.1 U1.8 | length 21.3
  Top Layer w0.254: R4.1@6.95,34.75 R5.1@6.95,37.725 ; R4.1 6.951,34.149 8.2,32.9 10.1,32.9 14.016,28.984 17.484,28.984 20.306,31.806 20.306,33.256 U1.8
NetR5_2: R5.2 R6.1 U1.7 | length 24.5
  Top Layer w0.254: R6.1@7.05,40.66 7.05,39.25 8.575,37.725 R5.2@8.85,37.725 ; R5.2 9.13,36.9 12.668,36.9 13.1,37.332 v1(13.1,38.2) ; v1(16.3,30) 17.782,30 19.675,31.893 U1.7
  Bottom Layer w0.254: v1(13.1,38.2) 13.5,37.8 13.5,32.8 v1(16.3,30)
NetR8_1: R8.1 U2.1 | length 12.6
  Top Layer w0.254: R8.1@15.2,22.573 R8.1@15.327,22.7 ; R8.1 R8.1@15.327,22.7 ; U2.1 26,24.783 23.917,22.7 R8.1@15.327,22.7
NetR11_2: R11.2 U1.10 | length 8.5
  Top Layer w0.254: U1.10 21.649,33.299 21.649,34.331 22.19,34.872 25.976,34.872 26.884,35.781 R11.2
SHDN: R4.2 U1.6 | length 12.4
  Top Layer w0.254: R4.2@8.85,34.75 9.3,34.3 16.25,34.3 U1.6
SNS: Q1.3 Rsns.2 U1.3 | length 41.8
  Top Layer w0.254: v1(13,45.9) 13,44 14.5,42.5 17.525,42.5 ; Rsns.2@17.525,45.2 17.525,42.5 ; U1.3 21.625,39.418 18.543,42.5 17.525,42.5 ; v1(30.1,41.1) 31.36,41.1 32.2,41.94 Q1.3
  Bottom Layer w0.254: v1(13,45.9) 13,44 14.675,42.325 29.475,42.325 30.1,41.7 v1(30.1,41.1)
SS_5V: C7.2 U2.5 | length 8.3
  Top Layer w0.254: C7.2 24.895,19.59 26.505,19.59 27.255,20.339 27.271,20.339 28,21.068 U2.5
SW_5V: C3.2 L1.2 U2.7 U2.8 | length 12.7
  Top Layer w0.254: U2.8 U2.7 27.502,28.836 27.502,30.275 ; L1.2 27.502,30.99 27.502,30.275 ; C3.2 32.115,27.449 29.314,30.25 27.527,30.25 27.502,30.275
VREG_5V: C6.2 U2.3 | length 9.4
  Top Layer w0.254: C6.2 21.283,19.561 22.883,19.561 27,23.678 U2.3
pads on no net: J1. J2.27 U1.11

## Polygon pours and split planes (outlines as drawn)
DRAIN on Top Layer "GND" (solid, pour order 31): 43.22,32 51,32 51,48.475 50.976,48.499 36.5,48.499 36.5,40.87 36.525,40.845 45.42,40.845 45.42,44 48.47,44 48.47,39.13 43.22,39.13
5V_OUT on Top Layer "GND" (solid, pour order 29): 33.065,10 33.675,10.907 33.675,12.63 32.829,13.476 32.115,13.476 32.115,10
+12V on Top Layer "GND" (solid, pour order 27): 38.325,34.142 38.325,34.167 42.77,34.167 42.77,31.738 42.837,31.671 53.692,31.671 53.692,13.476 43.22,13.476 43.22,18.262 47.826,18.262 50,20.436 50,22.346 47.368,24.978 45.42,24.978 45.42,28.604 44.817,29.207 38.325,29.207 38.325,31.671
12V_OUT on Top Layer "GND" (solid, pour order 25): 16.48,13.476 16.48,10 3.1,10 3.1,13.476
5V_OUT on Top Layer "GND" (solid, pour order 23): 30.634,13.476 32.115,13.476 32.115,10 16.833,10 16.833,13.476
no net on Top Layer "GND" (solid, pour order 21): 16.532,11
GND on Top Layer "GND" (solid, pour order 17): 19.25,19 19.25,14.945 33.294,14.945 33.348,15 33.348,19
no net on Top Layer "Top Layer-No Net" (solid, pour order 11): 48.7,31.9
no net on Top Layer "Top Layer-No Net 1" (solid, pour order 7): 28.55,23.45
no net on Top Layer "Top Layer-No Net 2" (solid, pour order 5): 28.6,23.75
GND on Top Layer "Top Layer-GND" (solid, pour order 0): 3.1,18.6 7.203,18.6 7.1,29.8 6.8,29.8 3.1,29.8 3.1,26.6
GND on Bottom Layer "GND" (solid, remove dead copper, pour order 15): 60,50 60,0 0,0 0,50

## Silkscreen, mask and mechanical layers (free items; w line width, h text height)
Mechanical 1:
  lines w0.254: 53,0 54,0 59,0 60,0 60,1 60,20.679 60,22.836 60,29 60,36.309 60,50 50,50 48,50 46,50 44,50 42,50 39,50 37,50 34,50 17,50 2,50 0,50 0,0 53,0 ; 53,0 53,0

## Dimensions
0,50 to 60,50 on Top Overlay
60,50 to 60,0 on Top Overlay